# EAGLE board DRIVER MOTOR  (EAGLE 9.5.0), part 1 of 2
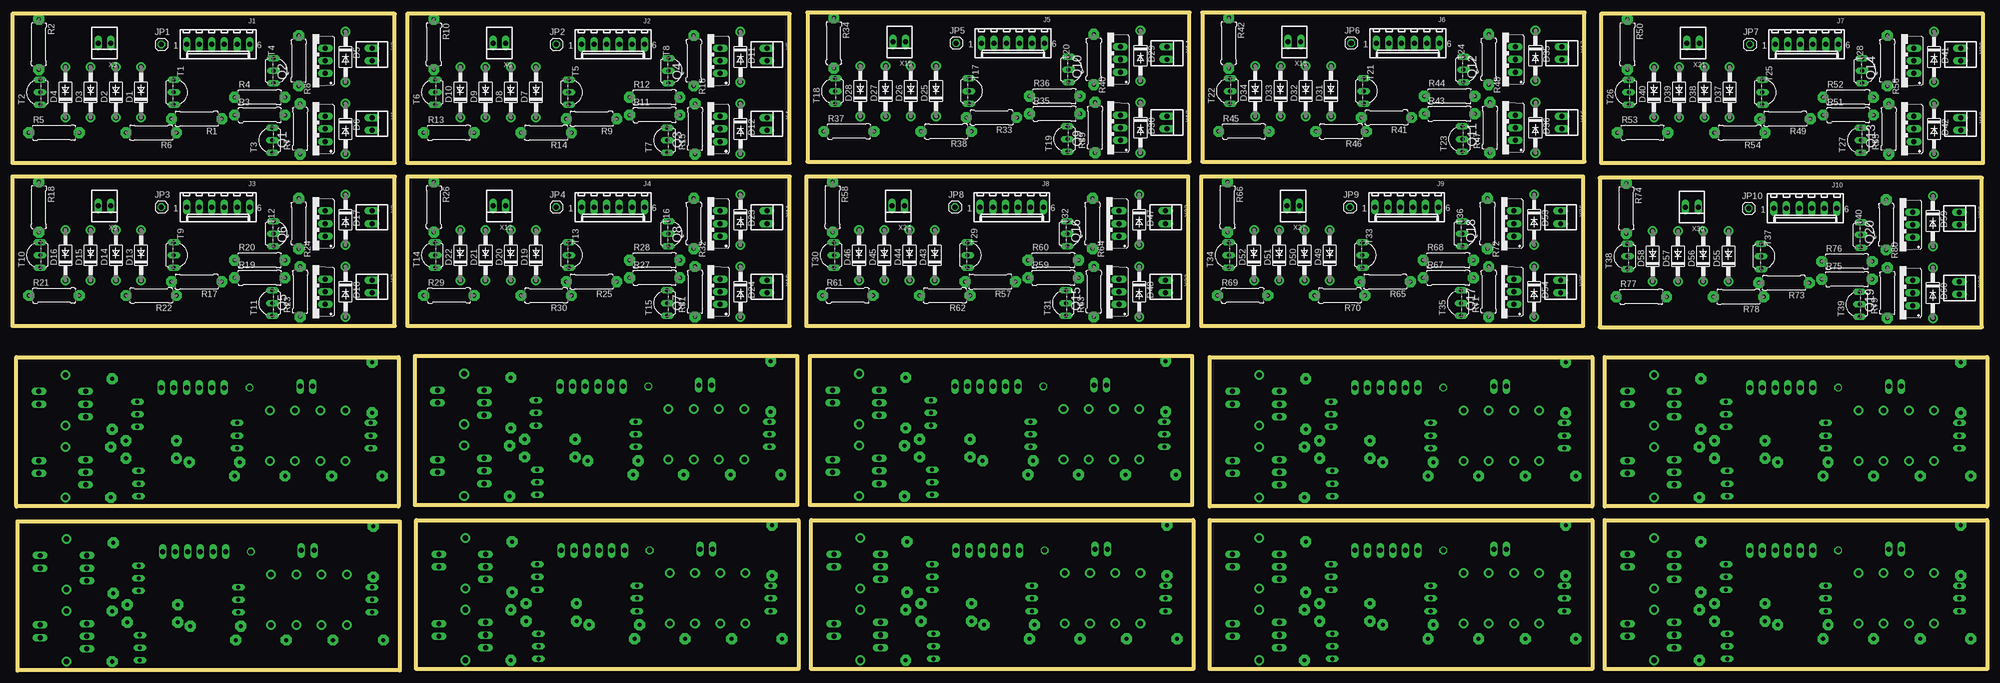
[diagram p0: board, top side]
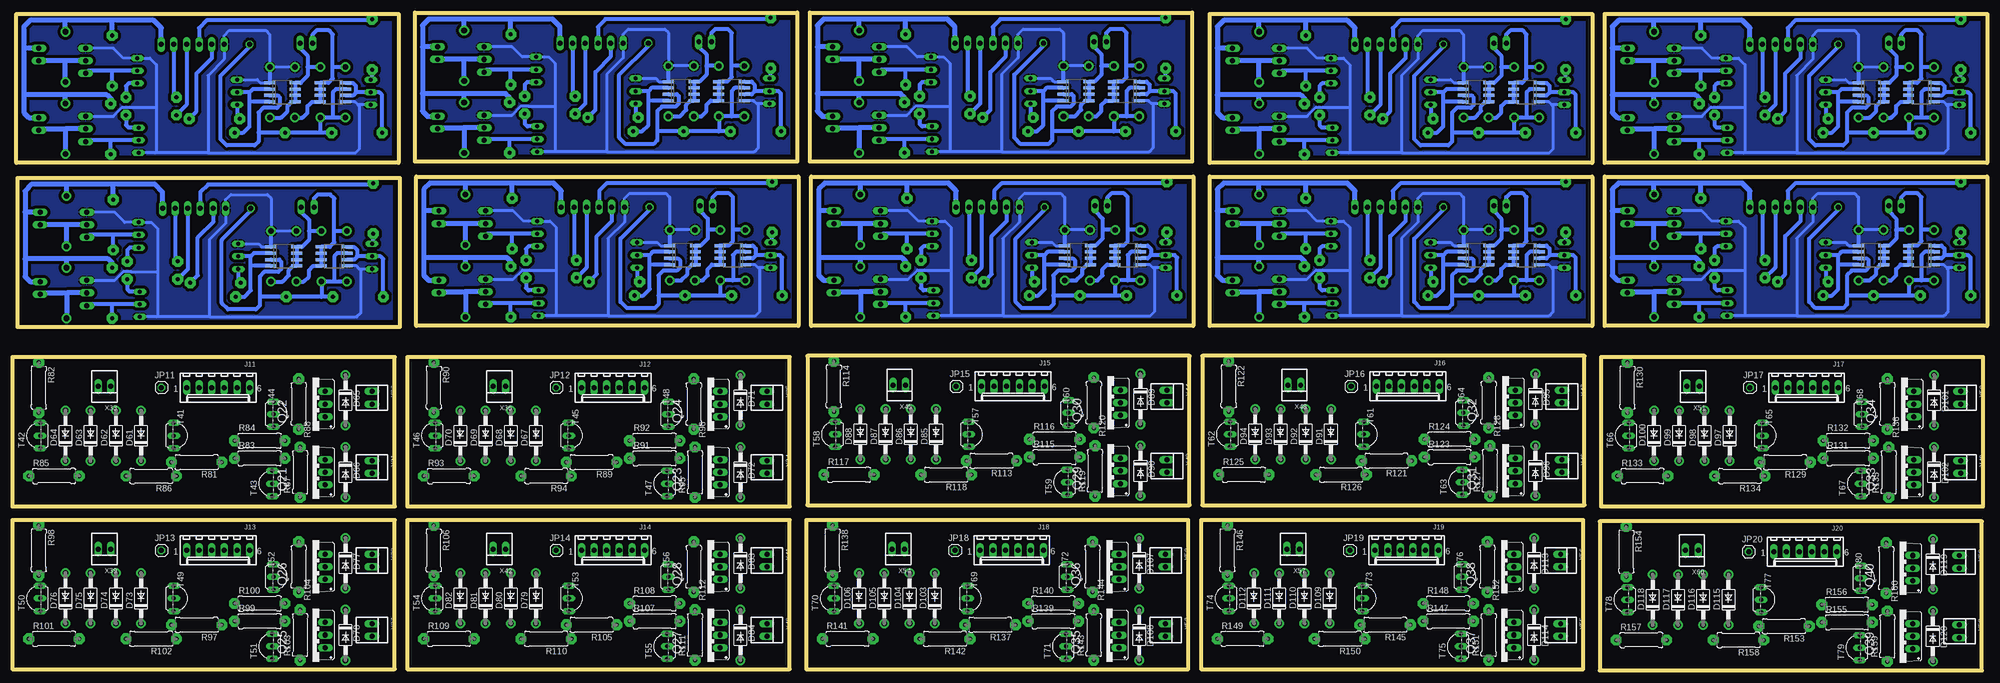
[diagram p1: board, bottom side, seen from below]

Size 397.51 x 132.36 mm. Coordinates in mm from the lower left corner, seen from the top.
Outline: 0,102.11 76.95,102.11 76.95,132.11 0,132.11 0,102.11
Outline: 79.5,102.11 156.45,102.11 156.45,132.11 79.5,132.11 79.5,102.11
Outline: 0,69.34 76.95,69.34 76.95,99.34 0,99.34 0,69.34
Outline: 79.5,69.34 156.45,69.34 156.45,99.34 79.5,99.34 79.5,69.34
Outline: 160.02,102.36 236.97,102.36 236.97,132.36 160.02,132.36 160.02,102.36
Outline: 239.52,102.36 316.47,102.36 316.47,132.36 239.52,132.36 239.52,102.36
Outline: 319.79,102.11 396.74,102.11 396.74,132.11 319.79,132.11 319.79,102.11
Outline: 159.77,69.34 236.72,69.34 236.72,99.34 159.77,99.34 159.77,69.34
Outline: 239.27,69.34 316.22,69.34 316.22,99.34 239.27,99.34 239.27,69.34
Outline: 319.53,69.09 396.48,69.09 396.48,99.09 319.53,99.09 319.53,69.09
Outline: 397.51,33.02 320.56,33.02 320.56,63.02 397.51,63.02 397.51,33.02
Outline: 318.01,33.02 241.06,33.02 241.06,63.02 318.01,63.02 318.01,33.02
Outline: 397.51,0.25 320.56,0.25 320.56,30.25 397.51,30.25 397.51,0.25
Outline: 318.01,0.25 241.06,0.25 241.06,30.25 318.01,30.25 318.01,0.25
Outline: 237.49,33.27 160.54,33.27 160.54,63.27 237.49,63.27 237.49,33.27
Outline: 157.99,33.27 81.04,33.27 81.04,63.27 157.99,63.27 157.99,33.27
Outline: 77.72,33.02 0.77,33.02 0.77,63.02 77.72,63.02 77.72,33.02
Outline: 237.74,0.25 160.79,0.25 160.79,30.25 237.74,30.25 237.74,0.25
Outline: 158.24,0.25 81.29,0.25 81.29,30.25 158.24,30.25 158.24,0.25
Outline: 77.98,0 1.03,0 1.03,30 77.98,30 77.98,0
Copper layers (1*16): Top 0.035mm / dielectric 1.5mm / Bottom 0.035mm
Design rules "default": minimum track width 6mil, minimum drill 0.35mm, track to track 24mil, track to pad 24mil, pad to pad 24mil, via to via 24mil, smd to smd 24mil, copper to edge 40mil, drill to drill 6mil, minimum pad ring 10mil, minimum via ring 8mil, stop-mask expansion 4mil, vias tented up to drill 0mil, thermal gap 10mil

## Footprints (pad centres in the part's own frame; a part is rotated, then mirrored left to right if it is on the bottom)
DO41-10 = drill 1.118 pad 1.93: A 5.08,0; C -5.08,0
SO08 = smd 0.6 x 2.2: 1 -1.905,-2.6; 2 -0.635,-2.6; 3 0.635,-2.6; 4 1.905,-2.6; 5 1.905,2.6; 6 0.635,2.6; 7 -0.635,2.6; 8 -1.905,2.6
6410-06 = drill 1.016 long: 1 6.35,0; 2 3.81,0; 3 1.27,0; 4 -1.27,0; 5 -3.81,0; 6 -6.35,0
1X01 = drill 1.016 octagon: 1 0,0
TO220BV = drill 1.016 long: D 0,-2.54; G -2.54,-2.54; S 2.54,-2.54
0309/10 = drill 0.813 pad 2.184 octagon: 1 -5.08,0; 2 5.08,0
TO92-ECB = drill 0.813 long: B 2.54,0; C 0,0; E -2.54,0
22-23-2021 = drill 1 long: 1 -1.27,0; 2 1.27,0

## Placement (x,y rotation side)
D1  1N4004  [DO41-10]  25.91,116.33 90 top
D2  1N4004  [DO41-10]  20.83,116.33 90 top
D3  1N4004  [DO41-10]  15.75,116.33 90 top
D4  1N4004  [DO41-10]  10.67,116.33 90 top
D5  1N4004  [DO41-10]  67.06,123.44 270 top
D6  1N4004  [DO41-10]  67.06,108.97 270 top
D7  1N4004  [DO41-10]  105.41,116.33 90 top
D8  1N4004  [DO41-10]  100.33,116.33 90 top
D9  1N4004  [DO41-10]  95.25,116.33 90 top
D10  1N4004  [DO41-10]  90.17,116.33 90 top
D11  1N4004  [DO41-10]  146.56,123.44 270 top
D12  1N4004  [DO41-10]  146.56,108.97 270 top
D13  1N4004  [DO41-10]  25.91,83.57 90 top
D14  1N4004  [DO41-10]  20.83,83.57 90 top
D15  1N4004  [DO41-10]  15.75,83.57 90 top
D16  1N4004  [DO41-10]  10.67,83.57 90 top
D17  1N4004  [DO41-10]  67.06,90.68 270 top
D18  1N4004  [DO41-10]  67.06,76.2 270 top
D19  1N4004  [DO41-10]  105.41,83.57 90 top
D20  1N4004  [DO41-10]  100.33,83.57 90 top
D21  1N4004  [DO41-10]  95.25,83.57 90 top
D22  1N4004  [DO41-10]  90.17,83.57 90 top
D23  1N4004  [DO41-10]  146.56,90.68 270 top
D24  1N4004  [DO41-10]  146.56,76.2 270 top
D25  1N4004  [DO41-10]  185.93,116.59 90 top
D26  1N4004  [DO41-10]  180.85,116.59 90 top
D27  1N4004  [DO41-10]  175.77,116.59 90 top
D28  1N4004  [DO41-10]  170.69,116.59 90 top
D29  1N4004  [DO41-10]  227.08,123.7 270 top
D30  1N4004  [DO41-10]  227.08,109.22 270 top
D31  1N4004  [DO41-10]  265.43,116.59 90 top
D32  1N4004  [DO41-10]  260.35,116.59 90 top
D33  1N4004  [DO41-10]  255.27,116.59 90 top
D34  1N4004  [DO41-10]  250.19,116.59 90 top
D35  1N4004  [DO41-10]  306.58,123.7 270 top
D36  1N4004  [DO41-10]  306.58,109.22 270 top
D37  1N4004  [DO41-10]  345.69,116.33 90 top
D38  1N4004  [DO41-10]  340.61,116.33 90 top
D39  1N4004  [DO41-10]  335.53,116.33 90 top
D40  1N4004  [DO41-10]  330.45,116.33 90 top
D41  1N4004  [DO41-10]  386.84,123.44 270 top
D42  1N4004  [DO41-10]  386.84,108.97 270 top
D43  1N4004  [DO41-10]  185.67,83.57 90 top
D44  1N4004  [DO41-10]  180.59,83.57 90 top
D45  1N4004  [DO41-10]  175.51,83.57 90 top
D46  1N4004  [DO41-10]  170.43,83.57 90 top
D47  1N4004  [DO41-10]  226.82,90.68 270 top
D48  1N4004  [DO41-10]  226.82,76.2 270 top
D49  1N4004  [DO41-10]  265.18,83.57 90 top
D50  1N4004  [DO41-10]  260.1,83.57 90 top
D51  1N4004  [DO41-10]  255.02,83.57 90 top
D52  1N4004  [DO41-10]  249.94,83.57 90 top
D53  1N4004  [DO41-10]  306.32,90.68 270 top
D54  1N4004  [DO41-10]  306.32,76.2 270 top
D55  1N4004  [DO41-10]  345.44,83.31 90 top
D56  1N4004  [DO41-10]  340.36,83.31 90 top
D57  1N4004  [DO41-10]  335.28,83.31 90 top
D58  1N4004  [DO41-10]  330.2,83.31 90 top
D59  1N4004  [DO41-10]  386.59,90.42 270 top
D60  1N4004  [DO41-10]  386.59,75.95 270 top
D61  1N4004  [DO41-10]  371.6,47.24 90 bottom
D62  1N4004  [DO41-10]  376.68,47.24 90 bottom
D63  1N4004  [DO41-10]  381.76,47.24 90 bottom
D64  1N4004  [DO41-10]  386.84,47.24 90 bottom
D65  1N4004  [DO41-10]  330.45,54.36 270 bottom
D66  1N4004  [DO41-10]  330.45,39.88 270 bottom
D67  1N4004  [DO41-10]  292.1,47.24 90 bottom
D68  1N4004  [DO41-10]  297.18,47.24 90 bottom
D69  1N4004  [DO41-10]  302.26,47.24 90 bottom
D70  1N4004  [DO41-10]  307.34,47.24 90 bottom
D71  1N4004  [DO41-10]  250.95,54.36 270 bottom
D72  1N4004  [DO41-10]  250.95,39.88 270 bottom
D73  1N4004  [DO41-10]  371.6,14.48 90 bottom
D74  1N4004  [DO41-10]  376.68,14.48 90 bottom
D75  1N4004  [DO41-10]  381.76,14.48 90 bottom
D76  1N4004  [DO41-10]  386.84,14.48 90 bottom
D77  1N4004  [DO41-10]  330.45,21.59 270 bottom
D78  1N4004  [DO41-10]  330.45,7.11 270 bottom
D79  1N4004  [DO41-10]  292.1,14.48 90 bottom
D80  1N4004  [DO41-10]  297.18,14.48 90 bottom
D81  1N4004  [DO41-10]  302.26,14.48 90 bottom
D82  1N4004  [DO41-10]  307.34,14.48 90 bottom
D83  1N4004  [DO41-10]  250.95,21.59 270 bottom
D84  1N4004  [DO41-10]  250.95,7.11 270 bottom
D85  1N4004  [DO41-10]  211.58,47.5 90 bottom
D86  1N4004  [DO41-10]  216.66,47.5 90 bottom
D87  1N4004  [DO41-10]  221.74,47.5 90 bottom
D88  1N4004  [DO41-10]  226.82,47.5 90 bottom
D89  1N4004  [DO41-10]  170.43,54.61 270 bottom
D90  1N4004  [DO41-10]  170.43,40.13 270 bottom
D91  1N4004  [DO41-10]  132.08,47.5 90 bottom
D92  1N4004  [DO41-10]  137.16,47.5 90 bottom
D93  1N4004  [DO41-10]  142.24,47.5 90 bottom
D94  1N4004  [DO41-10]  147.32,47.5 90 bottom
D95  1N4004  [DO41-10]  90.93,54.61 270 bottom
D96  1N4004  [DO41-10]  90.93,40.13 270 bottom
D97  1N4004  [DO41-10]  51.82,47.24 90 bottom
D98  1N4004  [DO41-10]  56.9,47.24 90 bottom
D99  1N4004  [DO41-10]  61.98,47.24 90 bottom
D100  1N4004  [DO41-10]  67.06,47.24 90 bottom
D101  1N4004  [DO41-10]  10.67,54.36 270 bottom
D102  1N4004  [DO41-10]  10.67,39.88 270 bottom
D103  1N4004  [DO41-10]  211.84,14.48 90 bottom
D104  1N4004  [DO41-10]  216.92,14.48 90 bottom
D105  1N4004  [DO41-10]  222,14.48 90 bottom
D106  1N4004  [DO41-10]  227.08,14.48 90 bottom
D107  1N4004  [DO41-10]  170.69,21.59 270 bottom
D108  1N4004  [DO41-10]  170.69,7.11 270 bottom
D109  1N4004  [DO41-10]  132.33,14.48 90 bottom
D110  1N4004  [DO41-10]  137.41,14.48 90 bottom
D111  1N4004  [DO41-10]  142.49,14.48 90 bottom
D112  1N4004  [DO41-10]  147.57,14.48 90 bottom
D113  1N4004  [DO41-10]  91.19,21.59 270 bottom
D114  1N4004  [DO41-10]  91.19,7.11 270 bottom
D115  1N4004  [DO41-10]  52.07,14.22 90 bottom
D116  1N4004  [DO41-10]  57.15,14.22 90 bottom
D117  1N4004  [DO41-10]  62.23,14.22 90 bottom
D118  1N4004  [DO41-10]  67.31,14.22 90 bottom
D119  1N4004  [DO41-10]  10.92,21.34 270 bottom
D120  1N4004  [DO41-10]  10.92,6.86 270 bottom
IC1  LM555D  [SO08]  23.37,116.33 270 bottom
IC2  LM555D  [SO08]  13.21,116.33 90 bottom
IC3  LM555D  [SO08]  102.87,116.33 270 bottom
IC4  LM555D  [SO08]  92.71,116.33 90 bottom
IC5  LM555D  [SO08]  23.37,83.57 270 bottom
IC6  LM555D  [SO08]  13.21,83.57 90 bottom
IC7  LM555D  [SO08]  102.87,83.57 270 bottom
IC8  LM555D  [SO08]  92.71,83.57 90 bottom
IC9  LM555D  [SO08]  183.39,116.59 270 bottom
IC10  LM555D  [SO08]  173.23,116.59 90 bottom
IC11  LM555D  [SO08]  262.89,116.59 270 bottom
IC12  LM555D  [SO08]  252.73,116.59 90 bottom
IC13  LM555D  [SO08]  343.15,116.33 270 bottom
IC14  LM555D  [SO08]  332.99,116.33 90 bottom
IC15  LM555D  [SO08]  183.13,83.57 270 bottom
IC16  LM555D  [SO08]  172.97,83.57 90 bottom
IC17  LM555D  [SO08]  262.64,83.57 270 bottom
IC18  LM555D  [SO08]  252.48,83.57 90 bottom
IC19  LM555D  [SO08]  342.9,83.31 270 bottom
IC20  LM555D  [SO08]  332.74,83.31 90 bottom
J1  22-27-2061-06  [6410-06]  41.4,125.98 180 top
J2  22-27-2061-06  [6410-06]  120.9,125.98 180 top
J3  22-27-2061-06  [6410-06]  41.4,93.22 180 top
J4  22-27-2061-06  [6410-06]  120.9,93.22 180 top
J5  22-27-2061-06  [6410-06]  201.42,126.24 180 top
J6  22-27-2061-06  [6410-06]  280.92,126.24 180 top
J7  22-27-2061-06  [6410-06]  361.19,125.98 180 top
J8  22-27-2061-06  [6410-06]  201.17,93.22 180 top
J9  22-27-2061-06  [6410-06]  280.67,93.22 180 top
J10  22-27-2061-06  [6410-06]  360.93,92.96 180 top
J11  22-27-2061-06  [6410-06]  356.11,56.9 180 bottom
J12  22-27-2061-06  [6410-06]  276.61,56.9 180 bottom
J13  22-27-2061-06  [6410-06]  356.11,24.13 180 bottom
J14  22-27-2061-06  [6410-06]  276.61,24.13 180 bottom
J15  22-27-2061-06  [6410-06]  196.09,57.15 180 bottom
J16  22-27-2061-06  [6410-06]  116.59,57.15 180 bottom
J17  22-27-2061-06  [6410-06]  36.32,56.9 180 bottom
J18  22-27-2061-06  [6410-06]  196.34,24.13 180 bottom
J19  22-27-2061-06  [6410-06]  116.84,24.13 180 bottom
J20  22-27-2061-06  [6410-06]  36.58,23.88 180 bottom
JP1  [1X01]  29.97,125.98 0 top
JP2  [1X01]  109.47,125.98 0 top
JP3  [1X01]  29.97,93.22 0 top
JP4  [1X01]  109.47,93.22 0 top
JP5  [1X01]  189.99,126.24 0 top
JP6  [1X01]  269.49,126.24 0 top
JP7  [1X01]  349.76,125.98 0 top
JP8  [1X01]  189.74,93.22 0 top
JP9  [1X01]  269.24,93.22 0 top
JP10  [1X01]  349.5,92.96 0 top
JP11  [1X01]  367.54,56.9 0 bottom
JP12  [1X01]  288.04,56.9 0 bottom
JP13  [1X01]  367.54,24.13 0 bottom
JP14  [1X01]  288.04,24.13 0 bottom
JP15  [1X01]  207.52,57.15 0 bottom
JP16  [1X01]  128.02,57.15 0 bottom
JP17  [1X01]  47.75,56.9 0 bottom
JP18  [1X01]  207.77,24.13 0 bottom
JP19  [1X01]  128.27,24.13 0 bottom
JP20  [1X01]  48.01,23.88 0 bottom
Q1  IRF530  [TO220BV]  60.45,108.97 90 top
Q2  IRF530  [TO220BV]  60.45,122.68 90 top
Q3  IRF530  [TO220BV]  139.95,108.97 90 top
Q4  IRF530  [TO220BV]  139.95,122.68 90 top
Q5  IRF530  [TO220BV]  60.45,76.2 90 top
Q6  IRF530  [TO220BV]  60.45,89.92 90 top
Q7  IRF530  [TO220BV]  139.95,76.2 90 top
Q8  IRF530  [TO220BV]  139.95,89.92 90 top
Q9  IRF530  [TO220BV]  220.47,109.22 90 top
Q10  IRF530  [TO220BV]  220.47,122.94 90 top
Q11  IRF530  [TO220BV]  299.97,109.22 90 top
Q12  IRF530  [TO220BV]  299.97,122.94 90 top
Q13  IRF530  [TO220BV]  380.24,108.97 90 top
Q14  IRF530  [TO220BV]  380.24,122.68 90 top
Q15  IRF530  [TO220BV]  220.22,76.2 90 top
Q16  IRF530  [TO220BV]  220.22,89.92 90 top
Q17  IRF530  [TO220BV]  299.72,76.2 90 top
Q18  IRF530  [TO220BV]  299.72,89.92 90 top
Q19  IRF530  [TO220BV]  379.98,75.95 90 top
Q20  IRF530  [TO220BV]  379.98,89.66 90 top
Q21  IRF530  [TO220BV]  337.06,39.88 90 bottom
Q22  IRF530  [TO220BV]  337.06,53.59 90 bottom
Q23  IRF530  [TO220BV]  257.56,39.88 90 bottom
Q24  IRF530  [TO220BV]  257.56,53.59 90 bottom
Q25  IRF530  [TO220BV]  337.06,7.11 90 bottom
Q26  IRF530  [TO220BV]  337.06,20.83 90 bottom
Q27  IRF530  [TO220BV]  257.56,7.11 90 bottom
Q28  IRF530  [TO220BV]  257.56,20.83 90 bottom
Q29  IRF530  [TO220BV]  177.04,40.13 90 bottom
Q30  IRF530  [TO220BV]  177.04,53.85 90 bottom
Q31  IRF530  [TO220BV]  97.54,40.13 90 bottom
Q32  IRF530  [TO220BV]  97.54,53.85 90 bottom
Q33  IRF530  [TO220BV]  17.27,39.88 90 bottom
Q34  IRF530  [TO220BV]  17.27,53.59 90 bottom
Q35  IRF530  [TO220BV]  177.29,7.11 90 bottom
Q36  IRF530  [TO220BV]  177.29,20.83 90 bottom
Q37  IRF530  [TO220BV]  97.79,7.11 90 bottom
Q38  IRF530  [TO220BV]  97.79,20.83 90 bottom
Q39  IRF530  [TO220BV]  17.53,6.86 90 bottom
Q40  IRF530  [TO220BV]  17.53,20.57 90 bottom
R1  150K  [0309/10]  37.08,111 180 top
R2  150K  [0309/10]  5.33,125.98 270 top
R3  150K  [0309/10]  49.78,111.76 0 top
R4  150K  [0309/10]  49.78,115.32 0 top
R5  68K  [0309/10]  8.38,108.2 0 top
R6  68K  [0309/10]  27.94,108.2 180 top
R7  47K  [0309/10]  57.91,108.97 90 top
R8  47K  [0309/10]  57.66,122.68 90 top
R9  150K  [0309/10]  116.59,111 180 top
R10  150K  [0309/10]  84.84,125.98 270 top
R11  150K  [0309/10]  129.29,111.76 0 top
R12  150K  [0309/10]  129.29,115.32 0 top
R13  68K  [0309/10]  87.88,108.2 0 top
R14  68K  [0309/10]  107.44,108.2 180 top
R15  47K  [0309/10]  137.41,108.97 90 top
R16  47K  [0309/10]  137.16,122.68 90 top
R17  150K  [0309/10]  37.08,78.23 180 top
R18  150K  [0309/10]  5.33,93.22 270 top
R19  150K  [0309/10]  49.78,78.99 0 top
R20  150K  [0309/10]  49.78,82.55 0 top
R21  68K  [0309/10]  8.38,75.44 0 top
R22  68K  [0309/10]  27.94,75.44 180 top
R23  47K  [0309/10]  57.91,76.2 90 top
R24  47K  [0309/10]  57.66,89.92 90 top
R25  150K  [0309/10]  116.59,78.23 180 top
R26  150K  [0309/10]  84.84,93.22 270 top
R27  150K  [0309/10]  129.29,78.99 0 top
R28  150K  [0309/10]  129.29,82.55 0 top
R29  68K  [0309/10]  87.88,75.44 0 top
R30  68K  [0309/10]  107.44,75.44 180 top
R31  47K  [0309/10]  137.41,76.2 90 top
R32  47K  [0309/10]  137.16,89.92 90 top
R33  150K  [0309/10]  197.1,111.25 180 top
R34  150K  [0309/10]  165.35,126.24 270 top
R35  150K  [0309/10]  209.8,112.01 0 top
R36  150K  [0309/10]  209.8,115.57 0 top
R37  68K  [0309/10]  168.4,108.46 0 top
R38  68K  [0309/10]  187.96,108.46 180 top
R39  47K  [0309/10]  217.93,109.22 90 top
R40  47K  [0309/10]  217.68,122.94 90 top
R41  150K  [0309/10]  276.61,111.25 180 top
R42  150K  [0309/10]  244.86,126.24 270 top
R43  150K  [0309/10]  289.31,112.01 0 top
R44  150K  [0309/10]  289.31,115.57 0 top
R45  68K  [0309/10]  247.9,108.46 0 top
R46  68K  [0309/10]  267.46,108.46 180 top
R47  47K  [0309/10]  297.43,109.22 90 top
R48  47K  [0309/10]  297.18,122.94 90 top
R49  150K  [0309/10]  356.87,111 180 top
R50  150K  [0309/10]  325.12,125.98 270 top
R51  150K  [0309/10]  369.57,111.76 0 top
R52  150K  [0309/10]  369.57,115.32 0 top
R53  68K  [0309/10]  328.17,108.2 0 top
R54  68K  [0309/10]  347.73,108.2 180 top
R55  47K  [0309/10]  377.7,108.97 90 top
R56  47K  [0309/10]  377.44,122.68 90 top
R57  150K  [0309/10]  196.85,78.23 180 top
R58  150K  [0309/10]  165.1,93.22 270 top
R59  150K  [0309/10]  209.55,78.99 0 top
R60  150K  [0309/10]  209.55,82.55 0 top
R61  68K  [0309/10]  168.15,75.44 0 top
R62  68K  [0309/10]  187.71,75.44 180 top
R63  47K  [0309/10]  217.68,76.2 90 top
R64  47K  [0309/10]  217.42,89.92 90 top
R65  150K  [0309/10]  276.35,78.23 180 top
R66  150K  [0309/10]  244.6,93.22 270 top
R67  150K  [0309/10]  289.05,78.99 0 top
R68  150K  [0309/10]  289.05,82.55 0 top
R69  68K  [0309/10]  247.65,75.44 0 top
R70  68K  [0309/10]  267.21,75.44 180 top
R71  47K  [0309/10]  297.18,76.2 90 top
R72  47K  [0309/10]  296.93,89.92 90 top
R73  150K  [0309/10]  356.62,77.98 180 top
R74  150K  [0309/10]  324.87,92.96 270 top
R75  150K  [0309/10]  369.32,78.74 0 top
R76  150K  [0309/10]  369.32,82.3 0 top
R77  68K  [0309/10]  327.91,75.18 0 top
R78  68K  [0309/10]  347.47,75.18 180 top
R79  47K  [0309/10]  377.44,75.95 90 top
R80  47K  [0309/10]  377.19,89.66 90 top
R81  150K  [0309/10]  360.43,41.91 180 bottom
R82  150K  [0309/10]  392.18,56.9 270 bottom
R83  150K  [0309/10]  347.73,42.67 0 bottom
R84  150K  [0309/10]  347.73,46.23 0 bottom
R85  68K  [0309/10]  389.13,39.12 0 bottom
R86  68K  [0309/10]  369.57,39.12 180 bottom
R87  47K  [0309/10]  339.6,39.88 90 bottom
R88  47K  [0309/10]  339.85,53.59 90 bottom
R89  150K  [0309/10]  280.92,41.91 180 bottom
R90  150K  [0309/10]  312.67,56.9 270 bottom
R91  150K  [0309/10]  268.22,42.67 0 bottom
R92  150K  [0309/10]  268.22,46.23 0 bottom
R93  68K  [0309/10]  309.63,39.12 0 bottom
R94  68K  [0309/10]  290.07,39.12 180 bottom
R95  47K  [0309/10]  260.1,39.88 90 bottom
R96  47K  [0309/10]  260.35,53.59 90 bottom
R97  150K  [0309/10]  360.43,9.14 180 bottom
R98  150K  [0309/10]  392.18,24.13 270 bottom
R99  150K  [0309/10]  347.73,9.91 0 bottom
R100  150K  [0309/10]  347.73,13.46 0 bottom
R101  68K  [0309/10]  389.13,6.35 0 bottom
R102  68K  [0309/10]  369.57,6.35 180 bottom
R103  47K  [0309/10]  339.6,7.11 90 bottom
R104  47K  [0309/10]  339.85,20.83 90 bottom
R105  150K  [0309/10]  280.92,9.14 180 bottom
R106  150K  [0309/10]  312.67,24.13 270 bottom
R107  150K  [0309/10]  268.22,9.91 0 bottom
R108  150K  [0309/10]  268.22,13.46 0 bottom
R109  68K  [0309/10]  309.63,6.35 0 bottom
R110  68K  [0309/10]  290.07,6.35 180 bottom
R111  47K  [0309/10]  260.1,7.11 90 bottom
R112  47K  [0309/10]  260.35,20.83 90 bottom
R113  150K  [0309/10]  200.41,42.16 180 bottom
R114  150K  [0309/10]  232.16,57.15 270 bottom
R115  150K  [0309/10]  187.71,42.93 0 bottom
R116  150K  [0309/10]  187.71,46.48 0 bottom
R117  68K  [0309/10]  229.11,39.37 0 bottom
R118  68K  [0309/10]  209.55,39.37 180 bottom
R119  47K  [0309/10]  179.58,40.13 90 bottom
R120  47K  [0309/10]  179.83,53.85 90 bottom
R121  150K  [0309/10]  120.9,42.16 180 bottom
R122  150K  [0309/10]  152.65,57.15 270 bottom
R123  150K  [0309/10]  108.2,42.93 0 bottom
R124  150K  [0309/10]  108.2,46.48 0 bottom
R125  68K  [0309/10]  149.61,39.37 0 bottom
R126  68K  [0309/10]  130.05,39.37 180 bottom
R127  47K  [0309/10]  100.08,40.13 90 bottom
R128  47K  [0309/10]  100.33,53.85 90 bottom
R129  150K  [0309/10]  40.64,41.91 180 bottom
R130  150K  [0309/10]  72.39,56.9 270 bottom
R131  150K  [0309/10]  27.94,42.67 0 bottom
R132  150K  [0309/10]  27.94,46.23 0 bottom
R133  68K  [0309/10]  69.34,39.12 0 bottom
R134  68K  [0309/10]  49.78,39.12 180 bottom
R135  47K  [0309/10]  19.81,39.88 90 bottom
R136  47K  [0309/10]  20.07,53.59 90 bottom
R137  150K  [0309/10]  200.66,9.14 180 bottom
R138  150K  [0309/10]  232.41,24.13 270 bottom
R139  150K  [0309/10]  187.96,9.91 0 bottom
R140  150K  [0309/10]  187.96,13.46 0 bottom
R141  68K  [0309/10]  229.36,6.35 0 bottom
R142  68K  [0309/10]  209.8,6.35 180 bottom
R143  47K  [0309/10]  179.83,7.11 90 bottom
R144  47K  [0309/10]  180.09,20.83 90 bottom
R145  150K  [0309/10]  121.16,9.14 180 bottom
R146  150K  [0309/10]  152.91,24.13 270 bottom
R147  150K  [0309/10]  108.46,9.91 0 bottom
R148  150K  [0309/10]  108.46,13.46 0 bottom
R149  68K  [0309/10]  149.86,6.35 0 bottom
R150  68K  [0309/10]  130.3,6.35 180 bottom
R151  47K  [0309/10]  100.33,7.11 90 bottom
R152  47K  [0309/10]  100.58,20.83 90 bottom
R153  150K  [0309/10]  40.89,8.89 180 bottom
R154  150K  [0309/10]  72.64,23.88 270 bottom
R155  150K  [0309/10]  28.19,9.65 0 bottom
R156  150K  [0309/10]  28.19,13.21 0 bottom
R157  68K  [0309/10]  69.6,6.1 0 bottom
R158  68K  [0309/10]  50.04,6.1 180 bottom
R159  47K  [0309/10]  20.07,6.86 90 bottom
R160  47K  [0309/10]  20.32,20.57 90 bottom
T1  2SC945  [TO92-ECB]  32.51,116.33 270 top
T2  2SC945  [TO92-ECB]  5.59,116.33 90 top
T3  2SC945  [TO92-ECB]  52.32,106.68 90 top
T4  2SC945  [TO92-ECB]  52.58,120.65 270 top
T5  2SC945  [TO92-ECB]  112.01,116.33 270 top
T6  2SC945  [TO92-ECB]  85.09,116.33 90 top
T7  2SC945  [TO92-ECB]  131.83,106.68 90 top
T8  2SC945  [TO92-ECB]  132.08,120.65 270 top
T9  2SC945  [TO92-ECB]  32.51,83.57 270 top
T10  2SC945  [TO92-ECB]  5.59,83.57 90 top
T11  2SC945  [TO92-ECB]  52.32,73.91 90 top
T12  2SC945  [TO92-ECB]  52.58,87.88 270 top
T13  2SC945  [TO92-ECB]  112.01,83.57 270 top
T14  2SC945  [TO92-ECB]  85.09,83.57 90 top
T15  2SC945  [TO92-ECB]  131.83,73.91 90 top
T16  2SC945  [TO92-ECB]  132.08,87.88 270 top
T17  2SC945  [TO92-ECB]  192.53,116.59 270 top
T18  2SC945  [TO92-ECB]  165.61,116.59 90 top
T19  2SC945  [TO92-ECB]  212.34,106.93 90 top
T20  2SC945  [TO92-ECB]  212.6,120.9 270 top
T21  2SC945  [TO92-ECB]  272.03,116.59 270 top
T22  2SC945  [TO92-ECB]  245.11,116.59 90 top
T23  2SC945  [TO92-ECB]  291.85,106.93 90 top
T24  2SC945  [TO92-ECB]  292.1,120.9 270 top
T25  2SC945  [TO92-ECB]  352.3,116.33 270 top
T26  2SC945  [TO92-ECB]  325.37,116.33 90 top
T27  2SC945  [TO92-ECB]  372.11,106.68 90 top
T28  2SC945  [TO92-ECB]  372.36,120.65 270 top
T29  2SC945  [TO92-ECB]  192.28,83.57 270 top
T30  2SC945  [TO92-ECB]  165.35,83.57 90 top
T31  2SC945  [TO92-ECB]  212.09,73.91 90 top
T32  2SC945  [TO92-ECB]  212.34,87.88 270 top
T33  2SC945  [TO92-ECB]  271.78,83.57 270 top
T34  2SC945  [TO92-ECB]  244.86,83.57 90 top
T35  2SC945  [TO92-ECB]  291.59,73.91 90 top
T36  2SC945  [TO92-ECB]  291.85,87.88 270 top
T37  2SC945  [TO92-ECB]  352.04,83.31 270 top
T38  2SC945  [TO92-ECB]  325.12,83.31 90 top
T39  2SC945  [TO92-ECB]  371.86,73.66 90 top
T40  2SC945  [TO92-ECB]  372.11,87.63 270 top
T41  2SC945  [TO92-ECB]  365,47.24 270 bottom
T42  2SC945  [TO92-ECB]  391.92,47.24 90 bottom
T43  2SC945  [TO92-ECB]  345.19,37.59 90 bottom
T44  2SC945  [TO92-ECB]  344.93,51.56 270 bottom
T45  2SC945  [TO92-ECB]  285.5,47.24 270 bottom
T46  2SC945  [TO92-ECB]  312.42,47.24 90 bottom
T47  2SC945  [TO92-ECB]  265.68,37.59 90 bottom
T48  2SC945  [TO92-ECB]  265.43,51.56 270 bottom
T49  2SC945  [TO92-ECB]  365,14.48 270 bottom
T50  2SC945  [TO92-ECB]  391.92,14.48 90 bottom
T51  2SC945  [TO92-ECB]  345.19,4.83 90 bottom
T52  2SC945  [TO92-ECB]  344.93,18.8 270 bottom
T53  2SC945  [TO92-ECB]  285.5,14.48 270 bottom
T54  2SC945  [TO92-ECB]  312.42,14.48 90 bottom
T55  2SC945  [TO92-ECB]  265.68,4.83 90 bottom
T56  2SC945  [TO92-ECB]  265.43,18.8 270 bottom
T57  2SC945  [TO92-ECB]  204.98,47.5 270 bottom
T58  2SC945  [TO92-ECB]  231.9,47.5 90 bottom
T59  2SC945  [TO92-ECB]  185.17,37.85 90 bottom
T60  2SC945  [TO92-ECB]  184.91,51.82 270 bottom
T61  2SC945  [TO92-ECB]  125.48,47.5 270 bottom
T62  2SC945  [TO92-ECB]  152.4,47.5 90 bottom
T63  2SC945  [TO92-ECB]  105.66,37.85 90 bottom
T64  2SC945  [TO92-ECB]  105.41,51.82 270 bottom
T65  2SC945  [TO92-ECB]  45.21,47.24 270 bottom
T66  2SC945  [TO92-ECB]  72.14,47.24 90 bottom
T67  2SC945  [TO92-ECB]  25.4,37.59 90 bottom
T68  2SC945  [TO92-ECB]  25.15,51.56 270 bottom
T69  2SC945  [TO92-ECB]  205.23,14.48 270 bottom
T70  2SC945  [TO92-ECB]  232.16,14.48 90 bottom
T71  2SC945  [TO92-ECB]  185.42,4.83 90 bottom
T72  2SC945  [TO92-ECB]  185.17,18.8 270 bottom
T73  2SC945  [TO92-ECB]  125.73,14.48 270 bottom
T74  2SC945  [TO92-ECB]  152.65,14.48 90 bottom
T75  2SC945  [TO92-ECB]  105.92,4.83 90 bottom
T76  2SC945  [TO92-ECB]  105.66,18.8 270 bottom
T77  2SC945  [TO92-ECB]  45.47,14.22 270 bottom
T78  2SC945  [TO92-ECB]  72.39,14.22 90 bottom
T79  2SC945  [TO92-ECB]  25.65,4.57 90 bottom
T80  2SC945  [TO92-ECB]  25.4,18.54 270 bottom
X1  22-23-2021  [22-23-2021]  72.39,109.98 270 top
X2  22-23-2021  [22-23-2021]  72.39,123.95 270 top
X3  22-23-2021  [22-23-2021]  18.54,126.24 180 top
X4  22-23-2021  [22-23-2021]  151.89,109.98 270 top
X5  22-23-2021  [22-23-2021]  151.89,123.95 270 top
X6  22-23-2021  [22-23-2021]  98.04,126.24 180 top
X7  22-23-2021  [22-23-2021]  72.39,77.22 270 top
X8  22-23-2021  [22-23-2021]  72.39,91.19 270 top
X9  22-23-2021  [22-23-2021]  18.54,93.47 180 top
X10  22-23-2021  [22-23-2021]  151.89,77.22 270 top
X11  22-23-2021  [22-23-2021]  151.89,91.19 270 top
X12  22-23-2021  [22-23-2021]  98.04,93.47 180 top
X13  22-23-2021  [22-23-2021]  232.41,110.24 270 top
X14  22-23-2021  [22-23-2021]  232.41,124.21 270 top
X15  22-23-2021  [22-23-2021]  178.56,126.49 180 top
X16  22-23-2021  [22-23-2021]  311.91,110.24 270 top
X17  22-23-2021  [22-23-2021]  311.91,124.21 270 top
X18  22-23-2021  [22-23-2021]  258.06,126.49 180 top
X19  22-23-2021  [22-23-2021]  392.18,109.98 270 top
X20  22-23-2021  [22-23-2021]  392.18,123.95 270 top
X21  22-23-2021  [22-23-2021]  338.33,126.24 180 top
X22  22-23-2021  [22-23-2021]  232.16,77.22 270 top
X23  22-23-2021  [22-23-2021]  232.16,91.19 270 top
X24  22-23-2021  [22-23-2021]  178.31,93.47 180 top
X25  22-23-2021  [22-23-2021]  311.66,77.22 270 top
X26  22-23-2021  [22-23-2021]  311.66,91.19 270 top
X27  22-23-2021  [22-23-2021]  257.81,93.47 180 top
X28  22-23-2021  [22-23-2021]  391.92,76.96 270 top
X29  22-23-2021  [22-23-2021]  391.92,90.93 270 top
X30  22-23-2021  [22-23-2021]  338.07,93.22 180 top
X31  22-23-2021  [22-23-2021]  325.12,40.89 270 bottom
X32  22-23-2021  [22-23-2021]  325.12,54.86 270 bottom
X33  22-23-2021  [22-23-2021]  378.97,57.15 180 bottom
X34  22-23-2021  [22-23-2021]  245.62,40.89 270 bottom
X35  22-23-2021  [22-23-2021]  245.62,54.86 270 bottom
X36  22-23-2021  [22-23-2021]  299.47,57.15 180 bottom
X37  22-23-2021  [22-23-2021]  325.12,8.13 270 bottom
X38  22-23-2021  [22-23-2021]  325.12,22.1 270 bottom
X39  22-23-2021  [22-23-2021]  378.97,24.38 180 bottom
X40  22-23-2021  [22-23-2021]  245.62,8.13 270 bottom
X41  22-23-2021  [22-23-2021]  245.62,22.1 270 bottom
X42  22-23-2021  [22-23-2021]  299.47,24.38 180 bottom
X43  22-23-2021  [22-23-2021]  165.1,41.15 270 bottom
X44  22-23-2021  [22-23-2021]  165.1,55.12 270 bottom
X45  22-23-2021  [22-23-2021]  218.95,57.4 180 bottom
X46  22-23-2021  [22-23-2021]  85.6,41.15 270 bottom
X47  22-23-2021  [22-23-2021]  85.6,55.12 270 bottom
X48  22-23-2021  [22-23-2021]  139.45,57.4 180 bottom
X49  22-23-2021  [22-23-2021]  5.33,40.89 270 bottom
X50  22-23-2021  [22-23-2021]  5.33,54.86 270 bottom
X51  22-23-2021  [22-23-2021]  59.18,57.15 180 bottom
X52  22-23-2021  [22-23-2021]  165.35,8.13 270 bottom
X53  22-23-2021  [22-23-2021]  165.35,22.1 270 bottom
X54  22-23-2021  [22-23-2021]  219.2,24.38 180 bottom
X55  22-23-2021  [22-23-2021]  85.85,8.13 270 bottom
X56  22-23-2021  [22-23-2021]  85.85,22.1 270 bottom
X57  22-23-2021  [22-23-2021]  139.7,24.38 180 bottom
X58  22-23-2021  [22-23-2021]  5.59,7.87 270 bottom
X59  22-23-2021  [22-23-2021]  5.59,21.84 270 bottom
X60  22-23-2021  [22-23-2021]  59.44,24.13 180 bottom

## Library data of the parts
D1-D120 = diode
IC1-IC20 = linear
J1-J20 = con-molex; MF: MOLEX; OC_FARNELL: unknown; OC_NEWARK: unknown
JP1-JP20 = pinhead
Q1-Q40 = transistor-power
R1-R160 = rcl; SPICEPREFIX: R
T1-T80 = transistor
X1-X60 = con-molex; MF: MOLEX; MPN: 22-23-2021; OC_FARNELL: 1462926; OC_NEWARK: 25C3832

## Nets
+12V: D3.C D4.C IC1.3 IC2.3 JP1.1 R5.2 R6.2
+12V1: D9.C D10.C IC3.3 IC4.3 JP2.1 R13.2 R14.2
+12V2: D15.C D16.C IC5.3 IC6.3 JP3.1 R21.2 R22.2
+12V3: D21.C D22.C IC7.3 IC8.3 JP4.1 R29.2 R30.2
+12V4: D27.C D28.C IC9.3 IC10.3 JP5.1 R37.2 R38.2
+12V5: D33.C D34.C IC11.3 IC12.3 JP6.1 R45.2 R46.2
+12V6: D39.C D40.C IC13.3 IC14.3 JP7.1 R53.2 R54.2
+12V7: D45.C D46.C IC15.3 IC16.3 JP8.1 R61.2 R62.2
+12V8: D51.C D52.C IC17.3 IC18.3 JP9.1 R69.2 R70.2
+12V9: D57.C D58.C IC19.3 IC20.3 JP10.1 R77.2 R78.2
GND: D1.A D2.A IC1.1 IC2.1 J1.1 Q1.S Q2.S T1.E T2.E T3.E T4.E
GND1: D7.A D8.A IC3.1 IC4.1 J2.1 Q3.S Q4.S T5.E T6.E T7.E T8.E
GND2: D13.A D14.A IC5.1 IC6.1 J3.1 Q5.S Q6.S T9.E T10.E T11.E T12.E
GND3: D19.A D20.A IC7.1 IC8.1 J4.1 Q7.S Q8.S T13.E T14.E T15.E T16.E
GND4: D25.A D26.A IC9.1 IC10.1 J5.1 Q9.S Q10.S T17.E T18.E T19.E T20.E
GND5: D31.A D32.A IC11.1 IC12.1 J6.1 Q11.S Q12.S T21.E T22.E T23.E T24.E
GND6: D37.A D38.A IC13.1 IC14.1 J7.1 Q13.S Q14.S T25.E T26.E T27.E T28.E
GND7: D43.A D44.A IC15.1 IC16.1 J8.1 Q15.S Q16.S T29.E T30.E T31.E T32.E
GND8: D49.A D50.A IC17.1 IC18.1 J9.1 Q17.S Q18.S T33.E T34.E T35.E T36.E
GND9: D55.A D56.A IC19.1 IC20.1 J10.1 Q19.S Q20.S T37.E T38.E T39.E T40.E
M1: J1.4 R3.1
M2: J1.5 R4.1
M3: J2.4 R11.1
M4: J2.5 R12.1
M5: J3.4 R19.1
M6: J3.5 R20.1
M7: J4.4 R27.1
M8: J4.5 R28.1
M9: J5.4 R35.1
M10: J5.5 R36.1
M11: J6.4 R43.1
M12: J6.5 R44.1
M13: J7.4 R51.1
M14: J7.5 R52.1
M15: J8.4 R59.1
M16: J8.5 R60.1
M17: J9.4 R67.1
M18: J9.5 R68.1
M19: J10.4 R75.1
M20: J10.5 R76.1
N$1: R1.2 T1.B
N$2: R2.2 T2.B
N$3: IC2.2 IC2.4 R5.1 T2.C
N$4: IC1.2 IC1.4 R6.1 T1.C
N$5: R3.2 T3.B
N$6: D1.C D3.A IC1.5 IC1.6 IC1.7 IC1.8 X3.1
N$7: D2.C D4.A IC2.5 IC2.6 IC2.7 IC2.8 X3.2
N$8: R4.2 T4.B
N$9: Q1.G R7.1 T3.C
N$10: Q2.G R8.1 T4.C
N$11: D6.A Q1.D X1.2
N$12: R9.2 T5.B
N$13: D5.A Q2.D X2.2
N$14: R10.2 T6.B
N$15: IC4.2 IC4.4 R13.1 T6.C
N$16: J1.2 R1.1
N$17: J1.3 R2.1
N$18: IC3.2 IC3.4 R14.1 T5.C
N$19: D7.C D9.A IC3.5 IC3.6 IC3.7 IC3.8 X6.1
N$20: D8.C D10.A IC4.5 IC4.6 IC4.7 IC4.8 X6.2
N$21: R11.2 T7.B
N$22: R12.2 T8.B
N$23: Q3.G R15.1 T7.C
N$24: Q4.G R16.1 T8.C
N$25: D12.A Q3.D X4.2
N$26: D11.A Q4.D X5.2
N$27: J2.2 R9.1
N$28: J2.3 R10.1
N$29: R17.2 T9.B
N$30: R18.2 T10.B
N$31: IC6.2 IC6.4 R21.1 T10.C
N$32: IC5.2 IC5.4 R22.1 T9.C
N$33: D13.C D15.A IC5.5 IC5.6 IC5.7 IC5.8 X9.1
N$34: D14.C D16.A IC6.5 IC6.6 IC6.7 IC6.8 X9.2
N$35: R19.2 T11.B
N$36: R20.2 T12.B
N$37: Q5.G R23.1 T11.C
N$38: Q6.G R24.1 T12.C
N$39: D18.A Q5.D X7.2
N$40: D17.A Q6.D X8.2
N$41: J3.2 R17.1
N$42: J3.3 R18.1
N$43: R25.2 T13.B
N$44: R26.2 T14.B
N$45: IC8.2 IC8.4 R29.1 T14.C
N$46: IC7.2 IC7.4 R30.1 T13.C
N$47: D19.C D21.A IC7.5 IC7.6 IC7.7 IC7.8 X12.1
N$48: D20.C D22.A IC8.5 IC8.6 IC8.7 IC8.8 X12.2
N$49: R27.2 T15.B
N$50: R28.2 T16.B
N$51: Q7.G R31.1 T15.C
N$52: Q8.G R32.1 T16.C
N$53: D24.A Q7.D X10.2
N$54: D23.A Q8.D X11.2
N$55: J4.2 R25.1
N$56: J4.3 R26.1
N$57: R33.2 T17.B
N$58: R34.2 T18.B
N$59: IC10.2 IC10.4 R37.1 T18.C
N$60: IC9.2 IC9.4 R38.1 T17.C
N$61: D25.C D27.A IC9.5 IC9.6 IC9.7 IC9.8 X15.1
N$62: D26.C D28.A IC10.5 IC10.6 IC10.7 IC10.8 X15.2
N$63: R35.2 T19.B
N$64: R36.2 T20.B
N$65: Q9.G R39.1 T19.C
N$66: Q10.G R40.1 T20.C
N$67: D30.A Q9.D X13.2
N$68: D29.A Q10.D X14.2
N$69: J5.2 R33.1
N$70: J5.3 R34.1
N$71: R41.2 T21.B
N$72: R42.2 T22.B
N$73: IC12.2 IC12.4 R45.1 T22.C
N$74: IC11.2 IC11.4 R46.1 T21.C
N$75: D31.C D33.A IC11.5 IC11.6 IC11.7 IC11.8 X18.1
N$76: D32.C D34.A IC12.5 IC12.6 IC12.7 IC12.8 X18.2
N$77: R43.2 T23.B
N$78: R44.2 T24.B
N$79: Q11.G R47.1 T23.C
N$80: Q12.G R48.1 T24.C
N$81: D36.A Q11.D X16.2
N$82: D35.A Q12.D X17.2
N$83: J6.2 R41.1
N$84: J6.3 R42.1
N$85: R49.2 T25.B
N$86: R50.2 T26.B
N$87: IC14.2 IC14.4 R53.1 T26.C
N$88: IC13.2 IC13.4 R54.1 T25.C
N$89: D37.C D39.A IC13.5 IC13.6 IC13.7 IC13.8 X21.1
N$90: D38.C D40.A IC14.5 IC14.6 IC14.7 IC14.8 X21.2
N$91: R51.2 T27.B
N$92: R52.2 T28.B
N$93: Q13.G R55.1 T27.C
N$94: Q14.G R56.1 T28.C
N$95: D42.A Q13.D X19.2
N$96: D41.A Q14.D X20.2
N$97: J7.2 R49.1
N$98: J7.3 R50.1
N$99: R57.2 T29.B
N$100: R58.2 T30.B
N$101: IC16.2 IC16.4 R61.1 T30.C
N$102: IC15.2 IC15.4 R62.1 T29.C
N$103: D43.C D45.A IC15.5 IC15.6 IC15.7 IC15.8 X24.1
N$104: D44.C D46.A IC16.5 IC16.6 IC16.7 IC16.8 X24.2
N$105: R59.2 T31.B
N$106: R60.2 T32.B
N$107: Q15.G R63.1 T31.C
N$108: Q16.G R64.1 T32.C
N$109: D48.A Q15.D X22.2
N$110: D47.A Q16.D X23.2
N$111: J8.2 R57.1
N$112: J8.3 R58.1
N$113: R65.2 T33.B
N$114: R66.2 T34.B
N$115: IC18.2 IC18.4 R69.1 T34.C
N$116: IC17.2 IC17.4 R70.1 T33.C
N$117: D49.C D51.A IC17.5 IC17.6 IC17.7 IC17.8 X27.1
N$118: D50.C D52.A IC18.5 IC18.6 IC18.7 IC18.8 X27.2
N$119: R67.2 T35.B
N$120: R68.2 T36.B
N$121: Q17.G R71.1 T35.C
N$122: Q18.G R72.1 T36.C
N$123: D54.A Q17.D X25.2
N$124: D53.A Q18.D X26.2
N$125: J9.2 R65.1
N$126: J9.3 R66.1
N$127: R73.2 T37.B
N$128: R74.2 T38.B
N$129: IC20.2 IC20.4 R77.1 T38.C
N$130: IC19.2 IC19.4 R78.1 T37.C
N$131: D55.C D57.A IC19.5 IC19.6 IC19.7 IC19.8 X30.1
N$132: D56.C D58.A IC20.5 IC20.6 IC20.7 IC20.8 X30.2
N$133: R75.2 T39.B
N$134: R76.2 T40.B
N$135: Q19.G R79.1 T39.C
N$136: Q20.G R80.1 T40.C
N$137: D60.A Q19.D X28.2
N$138: D59.A Q20.D X29.2
N$139: J10.2 R73.1
N$140: J10.3 R74.1
S$13: R146.1
VCC: D5.C D6.C J1.6 R7.2 R8.2 X1.1 X2.1
VCC1: D11.C D12.C J2.6 R15.2 R16.2 X4.1 X5.1
VCC2: D17.C D18.C J3.6 R23.2 R24.2 X7.1 X8.1
VCC3: D23.C D24.C J4.6 R31.2 R32.2 X10.1 X11.1
VCC4: D29.C D30.C J5.6 R39.2 R40.2 X13.1 X14.1
VCC5: D35.C D36.C J6.6 R47.2 R48.2 X16.1 X17.1
VCC6: D41.C D42.C J7.6 R55.2 R56.2 X19.1 X20.1
VCC7: D47.C D48.C J8.6 R63.2 R64.2 X22.1 X23.1
VCC8: D53.C D54.C J9.6 R71.2 R72.2 X25.1 X26.1
VCC9: D59.C D60.C J10.6 R79.2 R80.2 X28.1 X29.1